# EAGLE board MP3-Shield-Panel-v15 (EAGLE 6.6.0), part 1 of 2
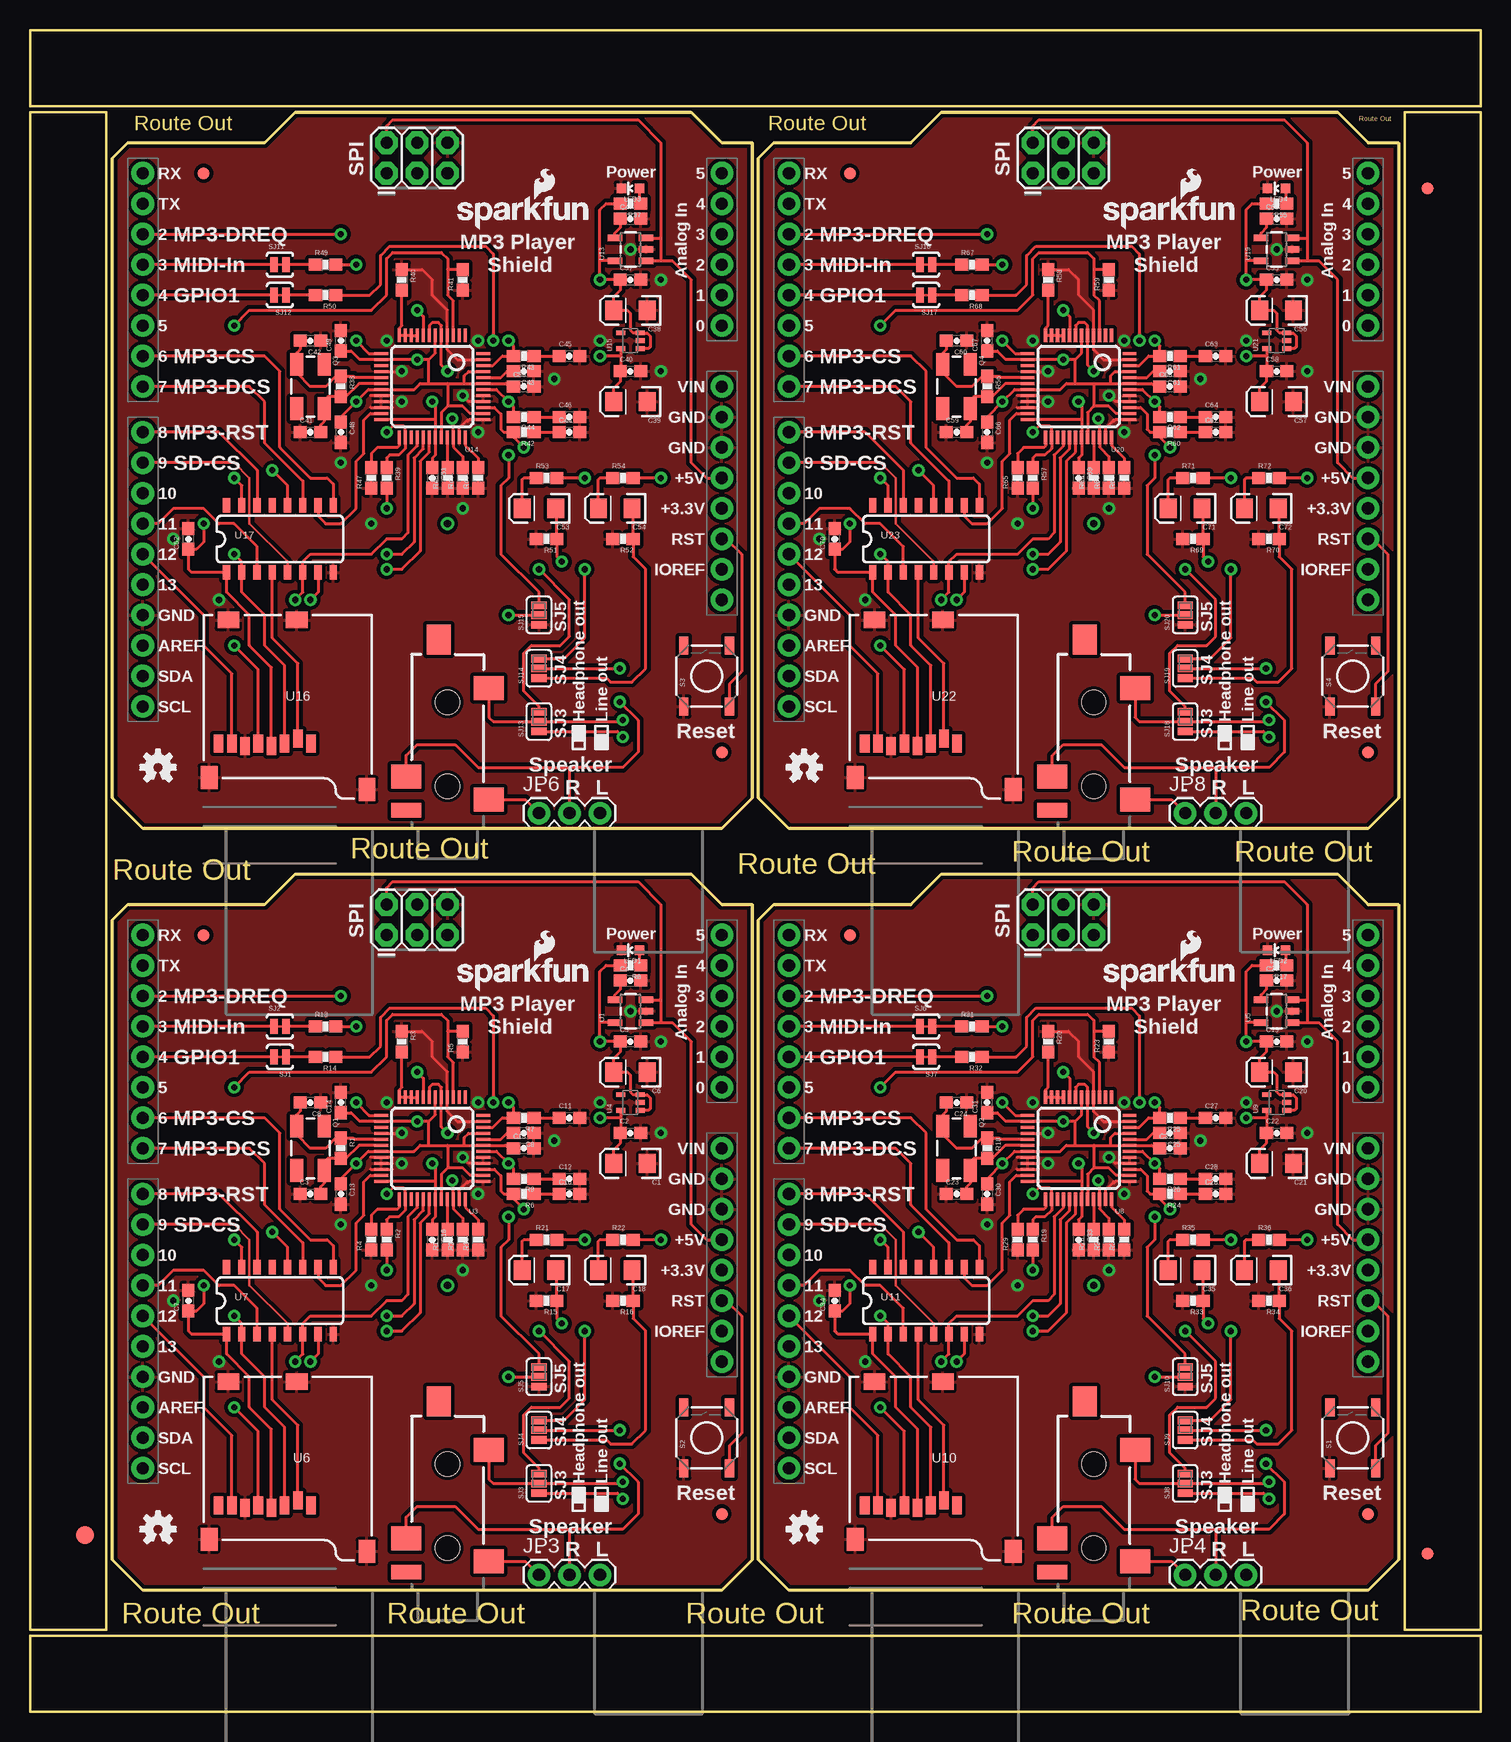
[diagram p0: board, top side]
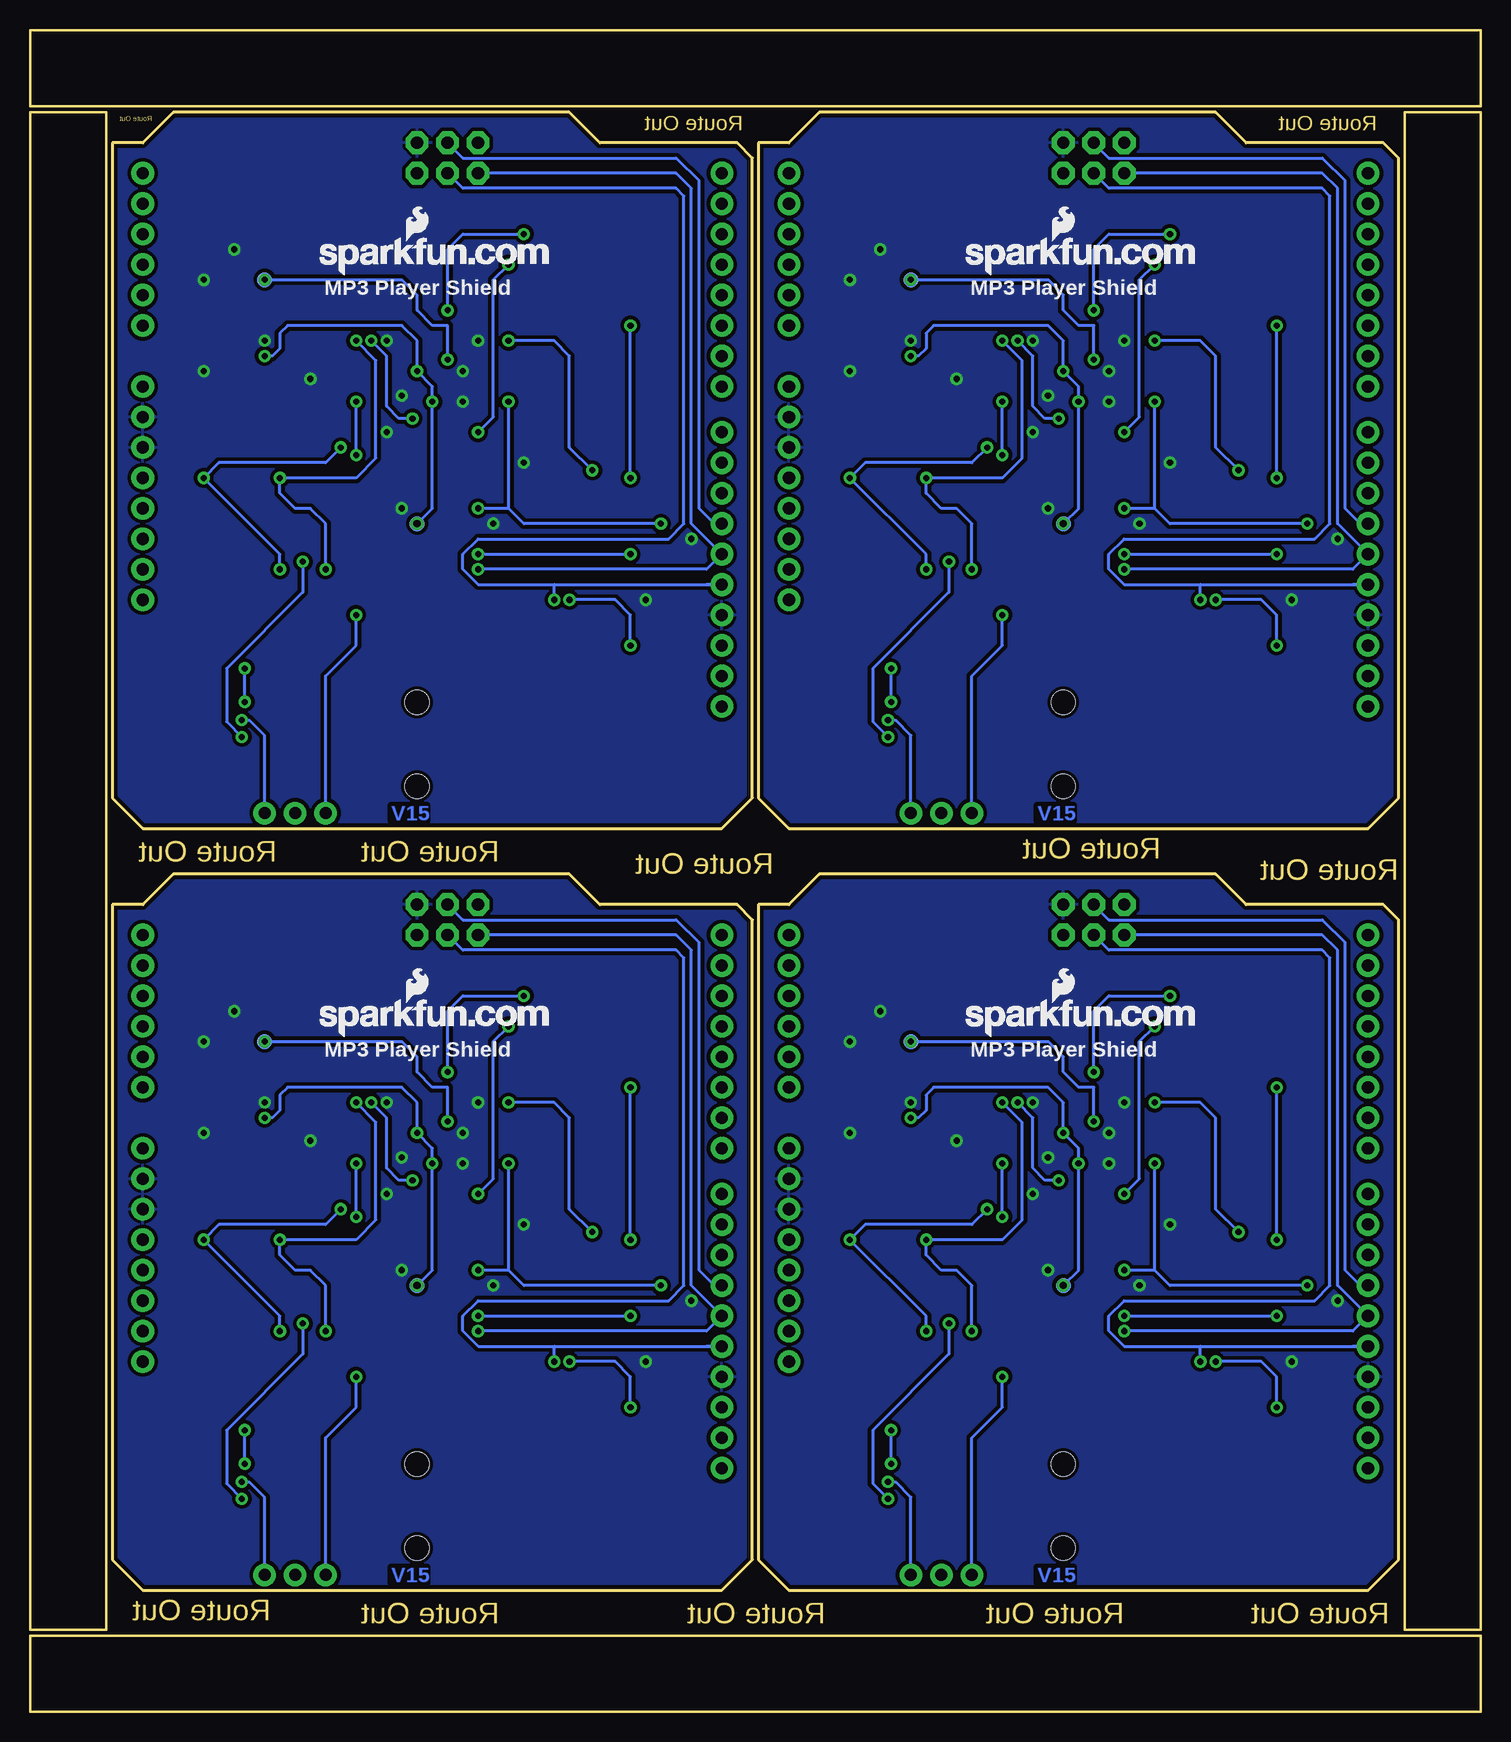
[diagram p1: board, bottom side, seen from below]

Size 120.9 x 140.21 mm. Coordinates in mm from the lower left corner, seen from the top.
Outline: 9.4,10.16 6.86,12.7 6.86,66.04 8.13,67.31 19.56,67.31 22.1,69.85 55.12,69.85 57.66,67.31 60.2,67.31 60.2,12.7 57.66,10.16 9.4,10.16
Outline: 63.25,10.16 60.71,12.7 60.71,66.04 61.98,67.31 73.41,67.31 75.95,69.85 108.97,69.85 111.51,67.31 114.05,67.31 114.05,12.7 111.51,10.16 63.25,10.16
Outline: 9.4,73.66 6.86,76.2 6.86,129.54 8.13,130.81 19.56,130.81 22.1,133.35 55.12,133.35 57.66,130.81 60.2,130.81 60.2,76.2 57.66,73.66 9.4,73.66
Outline: 63.25,73.66 60.71,76.2 60.71,129.54 61.98,130.81 73.41,130.81 75.95,133.35 108.97,133.35 111.51,130.81 114.05,130.81 114.05,76.2 111.51,73.66 63.25,73.66
Outline: 6.35,6.86 6.35,133.35 0,133.35 0,6.86 6.35,6.86
Outline: 0,0 120.9,0 120.9,6.35 0,6.35 0,0
Outline: 120.9,6.86 120.9,133.35 114.55,133.35 114.55,6.86 120.9,6.86
Outline: 120.9,140.21 0,140.21 0,133.86 120.9,133.86 120.9,140.21
Copper layers (1*16): Top 0.035mm / dielectric 1.5mm / Bottom 0.035mm
Design rules "SparkFun-2-layer": minimum track width 7mil, minimum drill 15mil, track to track 8mil, track to pad 8mil, pad to pad 8mil, via to via 8mil, smd to smd 8mil, copper to edge 8mil, drill to drill 8mil, minimum pad ring 12mil, minimum via ring 10mil, stop-mask expansion 4mil, vias tented up to drill 20mil, thermal gap 10mil

## Footprints (pad centres in the part's own frame; a part is rotated, then mirrored left to right if it is on the bottom)
EIA3216 = smd 1.4 x 1.6: A 1.4,0; C -1.4,0
0603-CAP = smd 1.1 x 1: 1 -0.85,0; 2 0.85,0
FIDUCIAL-1.5X3 = smd 1.5 x 1.5: 1 0,0
FIDUCIAL-1X2 = smd 1 x 1: 1 0,0
2X3 = drill 1.016 pad 1.88 octagon: 1 0,0; 2 0,2.54; 3 2.54,0; 4 2.54,2.54; 5 5.08,0; 6 5.08,2.54
AUDIO-JACK-3.5MM-SMD = smd 2 x 2.5: RING 4.3,3.45; SLEEVE 2.4,-3.45; TIP 11.7,-3.45 | smd 1.2 x 2.5: RSH 1.5,3.45 | smd 2.5 x 2: TSH 15.75,0.75 | hole 2: 3.5,0; 10.5,0
1X03 = drill 1.016 pad 1.88: 1 0,0; 2 2.54,0; 3 5.08,0
LED-0603 = smd 0.8 x 0.8: A 0,-0.75; C 0,0.75
CRYSTAL-SMD-5X3 = smd 1.9 x 1.1: 1 -1.85,-1.15; 2 1.85,-1.15; 3 1.85,1.15; 4 -1.85,1.15
0603-RES = smd 1.1 x 1: 1 -0.85,0; 2 0.85,0
TACTILE_SWITCH_SMD = smd 1.524 x 0.762: 1 -2.54,1.905; 2 2.54,1.905; 3 -2.54,-1.905; 4 2.54,-1.905
SJ_2S-TRACE = smd 0.635 x 1.27: 1 -0.508,0; 2 0.508,0
PAD-JUMPER-3-2OF3_NC_BY_PASTE_YES_SILK_FULL_BOX = smd 0.635 x 1.27: 1 -0.813,0; 2 0,0; 3 0.813,0
PAD.03X.05 = smd 1.27 x 1.27: P$1 0,0
SOT23-5 = smd 0.55 x 1.2: 1 -0.95,-1.3; 2 0,-1.3; 3 0.95,-1.3; 4 0.95,1.3; 5 -0.95,1.3
UNO_R3_SHIELD = drill 1.016 pad 1.88: 3.3V 50.8,26.67; 5V 50.8,29.21; A0 50.8,41.91; A1 50.8,44.45; A2 50.8,46.99; A3 50.8,49.53; A4 50.8,52.07; A5 50.8,54.61; AREF 2.54,15.24; D2 2.54,49.53; D3 2.54,46.99; D4 2.54,44.45; D5 2.54,41.91; D6 2.54,39.37; D7 2.54,36.83; D8 2.54,33.02; D9 2.54,30.48; D10 2.54,27.94; D11 2.54,25.4; D12 2.54,22.86; D13 2.54,20.32; GND@0 50.8,31.75; GND@1 50.8,34.29; GND@2 2.54,17.78; IOREF 50.8,21.59; NC 50.8,19.05; RES 50.8,24.13; RX 2.54,54.61; SCL 2.54,10.16; SDA 2.54,12.7; TX 2.54,52.07; VIN 50.8,36.83
LQFP-48 = smd 0.254 x 1.143: 1 -2.75,-4.25; 2 -2.25,-4.25; 3 -1.75,-4.25; 4 -1.25,-4.25; 5 -0.75,-4.25; 6 -0.25,-4.25; 7 0.25,-4.25; 8 0.75,-4.25; 9 1.25,-4.25; 10 1.75,-4.25; 11 2.25,-4.25; 12 2.75,-4.25; 25 2.75,4.25; 26 2.25,4.25; 27 1.75,4.25; 28 1.25,4.25; 29 0.75,4.25; 30 0.25,4.25; 31 -0.25,4.25; 32 -0.75,4.25; 33 -1.25,4.25; 34 -1.75,4.25; 35 -2.25,4.25; 36 -2.75,4.25 | smd 1.143 x 0.254: 13 4.25,-2.75; 14 4.25,-2.25; 15 4.25,-1.75; 16 4.25,-1.25; 17 4.25,-0.75; 18 4.25,-0.25; 19 4.25,0.25; 20 4.25,0.75; 21 4.25,1.25; 22 4.25,1.75; 23 4.25,2.25; 24 4.25,2.75; 37 -4.25,2.75; 38 -4.25,2.25; 39 -4.25,1.75; 40 -4.25,1.25; 41 -4.25,0.75; 42 -4.25,0.25; 43 -4.25,-0.25; 44 -4.25,-0.75; 45 -4.25,-1.25; 46 -4.25,-1.75; 47 -4.25,-2.25; 48 -4.25,-2.75
SC70 = smd 0.4 x 0.75: 1 -0.65,-0.825; 2 0,-0.825; 3 0.65,-0.825; 4 0.65,0.825; 5 -0.65,0.825
MICRO-SD-SOCKET-PP = smd 0.8 x 1.5: 1 -8.94,10.7; 2 -7.84,10.3; 3 -6.74,10.7; 4 -5.64,10.9; 5 -4.54,10.7; 6 -3.44,10.9; 7 -2.34,10.7; 8 -1.24,10.7 | smd 1.8 x 1.4: CD1 -2.05,0.4; CD2 -7.75,0.4 | smd 1.4 x 1.9: GND1 -13.6,14.55; GND3 -0.45,13.55
SO016 = smd 0.6 x 1.2: 1 -4.445,-2.8; 2 -3.175,-2.8; 3 -1.905,-2.8; 4 -0.635,-2.8; 5 0.635,-2.8; 6 1.905,-2.8; 7 3.175,-2.8; 8 4.445,-2.8; 9 4.445,2.8; 10 3.175,2.8; 11 1.905,2.8; 12 0.635,2.8; 13 -0.635,2.8; 14 -1.905,2.8; 15 -3.175,2.8; 16 -4.445,2.8

## Placement (x,y rotation side)
C1  10uF  [EIA3216]  50.04,45.72 180 top
C2  0.1uF  [0603-CAP]  50.04,48.26 0 top
C3  22pF  [0603-CAP]  23.37,43.18 0 top
C4  470pF  [0603-CAP]  50.04,60.96 0 top
C5  0.1uF  [0603-CAP]  50.04,55.88 0 top
C6  10uF  [EIA3216]  50.04,53.34 180 top
C7  0.1uF  [0603-CAP]  13.21,34.29 90 top
C8  22pF  [0603-CAP]  23.37,50.8 180 top
C9  1.0uF  [0603-CAP]  41.15,48.26 180 top
C10  10nF  [0603-CAP]  44.96,43.18 0 top
C11  10nF  [0603-CAP]  44.96,49.53 0 top
C12  47nF  [0603-CAP]  44.96,44.45 0 top
C13  0.1uF  [0603-CAP]  25.91,43.18 270 top
C14  0.1uF  [0603-CAP]  25.91,50.8 90 top
C15  0.1uF  [0603-CAP]  41.15,46.99 0 top
C16  0.1uF  [0603-CAP]  33.53,39.37 270 top
C17  10uF  [EIA3216]  42.42,36.83 180 top
C18  10uF  [EIA3216]  48.77,36.83 180 top
C19  0.1uF  [0603-CAP]  103.89,55.88 0 top
C20  10uF  [EIA3216]  103.89,53.34 180 top
C21  10uF  [EIA3216]  103.89,45.72 180 top
C22  0.1uF  [0603-CAP]  103.89,48.26 0 top
C23  22pF  [0603-CAP]  77.22,43.18 0 top
C24  22pF  [0603-CAP]  77.22,50.8 180 top
C25  1.0uF  [0603-CAP]  95,48.26 180 top
C26  10nF  [0603-CAP]  98.81,43.18 0 top
C27  10nF  [0603-CAP]  98.81,49.53 0 top
C28  47nF  [0603-CAP]  98.81,44.45 0 top
C29  470pF  [0603-CAP]  103.89,60.96 0 top
C30  0.1uF  [0603-CAP]  79.76,43.18 270 top
C31  0.1uF  [0603-CAP]  79.76,50.8 90 top
C32  0.1uF  [0603-CAP]  95,46.99 0 top
C33  0.1uF  [0603-CAP]  87.38,39.37 270 top
C34  0.1uF  [0603-CAP]  67.06,34.29 90 top
C35  10uF  [EIA3216]  96.27,36.83 180 top
C36  10uF  [EIA3216]  102.62,36.83 180 top
C37  0.1uF  [0603-CAP]  50.04,119.38 0 top
C38  10uF  [EIA3216]  50.04,116.84 180 top
C39  10uF  [EIA3216]  50.04,109.22 180 top
C40  0.1uF  [0603-CAP]  50.04,111.76 0 top
C41  22pF  [0603-CAP]  23.37,106.68 0 top
C42  22pF  [0603-CAP]  23.37,114.3 180 top
C43  1.0uF  [0603-CAP]  41.15,111.76 180 top
C44  10nF  [0603-CAP]  44.96,106.68 0 top
C45  10nF  [0603-CAP]  44.96,113.03 0 top
C46  47nF  [0603-CAP]  44.96,107.95 0 top
C47  470pF  [0603-CAP]  50.04,124.46 0 top
C48  0.1uF  [0603-CAP]  25.91,106.68 270 top
C49  0.1uF  [0603-CAP]  25.91,114.3 90 top
C50  0.1uF  [0603-CAP]  41.15,110.49 0 top
C51  0.1uF  [0603-CAP]  33.53,102.87 270 top
C52  0.1uF  [0603-CAP]  13.21,97.79 90 top
C53  10uF  [EIA3216]  42.42,100.33 180 top
C54  10uF  [EIA3216]  48.77,100.33 180 top
C55  0.1uF  [0603-CAP]  103.89,119.38 0 top
C56  10uF  [EIA3216]  103.89,116.84 180 top
C57  10uF  [EIA3216]  103.89,109.22 180 top
C58  0.1uF  [0603-CAP]  103.89,111.76 0 top
C59  22pF  [0603-CAP]  77.22,106.68 0 top
C60  22pF  [0603-CAP]  77.22,114.3 180 top
C61  1.0uF  [0603-CAP]  95,111.76 180 top
C62  10nF  [0603-CAP]  98.81,106.68 0 top
C63  10nF  [0603-CAP]  98.81,113.03 0 top
C64  47nF  [0603-CAP]  98.81,107.95 0 top
C65  470pF  [0603-CAP]  103.89,124.46 0 top
C66  0.1uF  [0603-CAP]  79.76,106.68 270 top
C67  0.1uF  [0603-CAP]  79.76,114.3 90 top
C68  0.1uF  [0603-CAP]  95,110.49 0 top
C69  0.1uF  [0603-CAP]  87.38,102.87 270 top
C70  0.1uF  [0603-CAP]  67.06,97.79 90 top
C71  10uF  [EIA3216]  96.27,100.33 180 top
C72  10uF  [EIA3216]  102.62,100.33 180 top
E$1  [FIDUCIAL-1.5X3]  4.57,14.73 0 top
E$4  [FIDUCIAL-1X2]  116.46,13.21 0 top
E$5  [FIDUCIAL-1X2]  116.46,127 180 top
J1  ISP/SPI  [2X3]  29.72,64.77 0 top
J2  ISP/SPI  [2X3]  83.57,64.77 0 top
J3  ISP/SPI  [2X3]  29.72,128.27 0 top
J4  ISP/SPI  [2X3]  83.57,128.27 0 top
JP1  [AUDIO-JACK-3.5MM-SMD]  34.8,10.16 90 top
JP2  [AUDIO-JACK-3.5MM-SMD]  88.65,10.16 90 top
JP3  Optional  [1X03]  42.42,11.43 0 top
JP4  Optional  [1X03]  96.27,11.43 0 top
JP5  [AUDIO-JACK-3.5MM-SMD]  34.8,73.66 90 top
JP6  Optional  [1X03]  42.42,74.93 0 top
JP7  [AUDIO-JACK-3.5MM-SMD]  88.65,73.66 90 top
JP8  Optional  [1X03]  96.27,74.93 0 top
LED1  Power  [LED-0603]  50.04,63.5 90 top
LED2  Power  [LED-0603]  103.89,63.5 90 top
LED3  Power  [LED-0603]  50.04,127 90 top
LED4  Power  [LED-0603]  103.89,127 90 top
LOGO1  OSHW-LOGOS  [OSHW-LOGO-S]  10.67,15.24 0 top
LOGO2  SFE_LOGO_NAME_FLAME.1_INCH  [SFE_LOGO_NAME_FLAME_.1]  35.18,59.94 0 top
LOGO3  OSHW-LOGOS  [OSHW-LOGO-S]  64.52,15.24 0 top
LOGO4  SFE_LOGO_NAME_FLAME.1_INCH  [SFE_LOGO_NAME_FLAME_.1]  89.03,59.94 0 top
LOGO5  OSHW-LOGOS  [OSHW-LOGO-S]  10.67,78.74 0 top
LOGO6  SFE_LOGO_NAME_FLAME.1_INCH  [SFE_LOGO_NAME_FLAME_.1]  35.18,123.44 0 top
LOGO7  OSHW-LOGOS  [OSHW-LOGO-S]  64.52,78.74 0 top
LOGO8  SFE_LOGO_NAME_FLAME.1_INCH  [SFE_LOGO_NAME_FLAME_.1]  89.03,123.44 0 top
Q1  12.288MHz  [CRYSTAL-SMD-5X3]  23.37,46.99 270 top
Q2  12.288MHz  [CRYSTAL-SMD-5X3]  77.22,46.99 270 top
Q3  12.288MHz  [CRYSTAL-SMD-5X3]  23.37,110.49 270 top
Q4  12.288MHz  [CRYSTAL-SMD-5X3]  77.22,110.49 270 top
R1  1M  [0603-RES]  25.91,46.99 270 top
R2  100k  [0603-RES]  29.72,39.37 270 top
R3  100k  [0603-RES]  30.99,55.88 270 top
R4  100k  [0603-RES]  28.45,39.37 90 top
R5  100k  [0603-RES]  36.07,55.88 90 top
R6  20  [0603-RES]  41.15,43.18 180 top
R7  20  [0603-RES]  41.15,49.53 180 top
R8  330  [0603-RES]  50.04,62.23 180 top
R9  10  [0603-RES]  41.15,44.45 180 top
R10  100k  [0603-RES]  36.07,39.37 90 top
R11  100k  [0603-RES]  34.8,39.37 90 top
R12  100k  [0603-RES]  37.34,39.37 90 top
R13  1K  [0603-RES]  24.64,57.15 0 top
R14  1K  [0603-RES]  24.64,54.61 180 top
R15  10K  [0603-RES]  43.05,34.29 180 top
R16  10K  [0603-RES]  49.4,34.29 180 top
R17  330  [0603-RES]  103.89,62.23 180 top
R18  1M  [0603-RES]  79.76,46.99 270 top
R19  100k  [0603-RES]  83.57,39.37 270 top
R20  100k  [0603-RES]  84.84,55.88 270 top
R21  470  [0603-RES]  43.05,39.37 0 top
R22  470  [0603-RES]  49.4,39.37 0 top
R23  100k  [0603-RES]  89.92,55.88 90 top
R24  20  [0603-RES]  95,43.18 180 top
R25  20  [0603-RES]  95,49.53 180 top
R26  10  [0603-RES]  95,44.45 180 top
R27  100k  [0603-RES]  89.92,39.37 90 top
R28  100k  [0603-RES]  88.65,39.37 90 top
R29  100k  [0603-RES]  82.3,39.37 90 top
R30  100k  [0603-RES]  91.19,39.37 90 top
R31  1K  [0603-RES]  78.49,57.15 0 top
R32  1K  [0603-RES]  78.49,54.61 180 top
R33  10K  [0603-RES]  96.9,34.29 180 top
R34  10K  [0603-RES]  103.25,34.29 180 top
R35  470  [0603-RES]  96.9,39.37 0 top
R36  470  [0603-RES]  103.25,39.37 0 top
R37  330  [0603-RES]  50.04,125.73 180 top
R38  1M  [0603-RES]  25.91,110.49 270 top
R39  100k  [0603-RES]  29.72,102.87 270 top
R40  100k  [0603-RES]  30.99,119.38 270 top
R41  100k  [0603-RES]  36.07,119.38 90 top
R42  20  [0603-RES]  41.15,106.68 180 top
R43  20  [0603-RES]  41.15,113.03 180 top
R44  10  [0603-RES]  41.15,107.95 180 top
R45  100k  [0603-RES]  36.07,102.87 90 top
R46  100k  [0603-RES]  34.8,102.87 90 top
R47  100k  [0603-RES]  28.45,102.87 90 top
R48  100k  [0603-RES]  37.34,102.87 90 top
R49  1K  [0603-RES]  24.64,120.65 0 top
R50  1K  [0603-RES]  24.64,118.11 180 top
R51  10K  [0603-RES]  43.05,97.79 180 top
R52  10K  [0603-RES]  49.4,97.79 180 top
R53  470  [0603-RES]  43.05,102.87 0 top
R54  470  [0603-RES]  49.4,102.87 0 top
R55  330  [0603-RES]  103.89,125.73 180 top
R56  1M  [0603-RES]  79.76,110.49 270 top
R57  100k  [0603-RES]  83.57,102.87 270 top
R58  100k  [0603-RES]  84.84,119.38 270 top
R59  100k  [0603-RES]  89.92,119.38 90 top
R60  20  [0603-RES]  95,106.68 180 top
R61  20  [0603-RES]  95,113.03 180 top
R62  10  [0603-RES]  95,107.95 180 top
R63  100k  [0603-RES]  89.92,102.87 90 top
R64  100k  [0603-RES]  88.65,102.87 90 top
R65  100k  [0603-RES]  82.3,102.87 90 top
R66  100k  [0603-RES]  91.19,102.87 90 top
R67  1K  [0603-RES]  78.49,120.65 0 top
R68  1K  [0603-RES]  78.49,118.11 180 top
R69  10K  [0603-RES]  96.9,97.79 180 top
R70  10K  [0603-RES]  103.25,97.79 180 top
R71  470  [0603-RES]  96.9,102.87 0 top
R72  470  [0603-RES]  103.25,102.87 0 top
S1  Reset  [TACTILE_SWITCH_SMD]  110.24,22.86 90 top
S2  Reset  [TACTILE_SWITCH_SMD]  56.39,22.86 90 top
S3  Reset  [TACTILE_SWITCH_SMD]  56.39,86.36 90 top
S4  Reset  [TACTILE_SWITCH_SMD]  110.24,86.36 90 top
SJ1  NC  [SJ_2S-TRACE]  20.83,54.61 180 top
SJ2  NC  [SJ_2S-TRACE]  20.83,57.15 0 top
SJ3  AC Coupling L  [PAD-JUMPER-3-2OF3_NC_BY_PASTE_YES_SILK_FULL_BOX]  42.42,19.05 90 top
SJ4  AC Coupling R  [PAD-JUMPER-3-2OF3_NC_BY_PASTE_YES_SILK_FULL_BOX]  42.42,23.5 90 top
SJ5  AC Coupling Gnd  [PAD-JUMPER-3-2OF3_NC_BY_PASTE_YES_SILK_FULL_BOX]  42.42,27.94 90 top
SJ6  NC  [SJ_2S-TRACE]  74.68,57.15 0 top
SJ7  NC  [SJ_2S-TRACE]  74.68,54.61 180 top
SJ8  AC Coupling L  [PAD-JUMPER-3-2OF3_NC_BY_PASTE_YES_SILK_FULL_BOX]  96.27,19.05 90 top
SJ9  AC Coupling R  [PAD-JUMPER-3-2OF3_NC_BY_PASTE_YES_SILK_FULL_BOX]  96.27,23.5 90 top
SJ10  AC Coupling Gnd  [PAD-JUMPER-3-2OF3_NC_BY_PASTE_YES_SILK_FULL_BOX]  96.27,27.94 90 top
SJ11  NC  [SJ_2S-TRACE]  20.83,120.65 0 top
SJ12  NC  [SJ_2S-TRACE]  20.83,118.11 180 top
SJ13  AC Coupling L  [PAD-JUMPER-3-2OF3_NC_BY_PASTE_YES_SILK_FULL_BOX]  42.42,82.55 90 top
SJ14  AC Coupling R  [PAD-JUMPER-3-2OF3_NC_BY_PASTE_YES_SILK_FULL_BOX]  42.42,87 90 top
SJ15  AC Coupling Gnd  [PAD-JUMPER-3-2OF3_NC_BY_PASTE_YES_SILK_FULL_BOX]  42.42,91.44 90 top
SJ16  NC  [SJ_2S-TRACE]  74.68,120.65 0 top
SJ17  NC  [SJ_2S-TRACE]  74.68,118.11 180 top
SJ18  AC Coupling L  [PAD-JUMPER-3-2OF3_NC_BY_PASTE_YES_SILK_FULL_BOX]  96.27,82.55 90 top
SJ19  AC Coupling R  [PAD-JUMPER-3-2OF3_NC_BY_PASTE_YES_SILK_FULL_BOX]  96.27,87 90 top
SJ20  AC Coupling Gnd  [PAD-JUMPER-3-2OF3_NC_BY_PASTE_YES_SILK_FULL_BOX]  96.27,91.44 90 top
TP1  [PAD.03X.05]  47.5,55.88 0 bottom
TP2  [PAD.03X.05]  34.8,35.56 0 bottom
TP3  [PAD.03X.05]  101.35,55.88 0 bottom
TP4  [PAD.03X.05]  88.65,35.56 0 bottom
TP5  [PAD.03X.05]  47.5,119.38 0 bottom
TP6  [PAD.03X.05]  34.8,99.06 0 bottom
TP7  [PAD.03X.05]  101.35,119.38 0 bottom
TP8  [PAD.03X.05]  88.65,99.06 0 bottom
U1  3.3V  [SOT23-5]  50.04,58.42 90 top
U2  ARDUINO_R3_SHIELD  [UNO_R3_SHIELD]  6.86,10.16 0 top
U3  VS1053  [LQFP-48]  33.53,46.99 180 top
U4  1.8V  [SC70]  50.04,50.8 90 top
U5  3.3V  [SOT23-5]  103.89,58.42 90 top
U6  USD-SOCKET  [MICRO-SD-SOCKET-PP]  14.48,27.94 180 top
U7  74HC4050 LVL CONVERTER  [SO016]  20.83,34.29 0 top
U8  VS1053  [LQFP-48]  87.38,46.99 180 top
U9  1.8V  [SC70]  103.89,50.8 90 top
U10  USD-SOCKET  [MICRO-SD-SOCKET-PP]  68.33,27.94 180 top
U11  74HC4050 LVL CONVERTER  [SO016]  74.68,34.29 0 top
U12  ARDUINO_R3_SHIELD  [UNO_R3_SHIELD]  60.71,10.16 0 top
U13  3.3V  [SOT23-5]  50.04,121.92 90 top
U14  VS1053  [LQFP-48]  33.53,110.49 180 top
U15  1.8V  [SC70]  50.04,114.3 90 top
U16  USD-SOCKET  [MICRO-SD-SOCKET-PP]  14.48,91.44 180 top
U17  74HC4050 LVL CONVERTER  [SO016]  20.83,97.79 0 top
U18  ARDUINO_R3_SHIELD  [UNO_R3_SHIELD]  6.86,73.66 0 top
U19  3.3V  [SOT23-5]  103.89,121.92 90 top
U20  VS1053  [LQFP-48]  87.38,110.49 180 top
U21  1.8V  [SC70]  103.89,114.3 90 top
U22  USD-SOCKET  [MICRO-SD-SOCKET-PP]  68.33,91.44 180 top
U23  74HC4050 LVL CONVERTER  [SO016]  74.68,97.79 0 top
U24  ARDUINO_R3_SHIELD  [UNO_R3_SHIELD]  60.71,73.66 0 top
U$1  FIDUCIAL1X2  [FIDUCIAL-1X2]  68.33,64.77 0 top
U$2  FIDUCIAL1X2  [FIDUCIAL-1X2]  111.51,16.51 0 top
U$3  LOGO-SFENEW  [SFE-NEW-WEBLOGO]  96.77,56.26 0 bottom
U$4  FIDUCIAL1X2  [FIDUCIAL-1X2]  14.48,64.77 0 top
U$5  FIDUCIAL1X2  [FIDUCIAL-1X2]  57.66,16.51 0 top
U$6  FIDUCIAL1X2  [FIDUCIAL-1X2]  14.48,128.27 0 top
U$7  FIDUCIAL1X2  [FIDUCIAL-1X2]  57.66,80.01 0 top
U$8  LOGO-SFENEW  [SFE-NEW-WEBLOGO]  42.93,56.26 0 bottom
U$9  LOGO-SFENEW  [SFE-NEW-WEBLOGO]  42.93,119.76 0 bottom
U$10  FIDUCIAL1X2  [FIDUCIAL-1X2]  68.33,128.27 0 top
U$11  FIDUCIAL1X2  [FIDUCIAL-1X2]  111.51,80.01 0 top
U$12  LOGO-SFENEW  [SFE-NEW-WEBLOGO]  96.77,119.76 0 bottom

## Library data of the parts
C1 C6 C17 C18 C20 C21 C35 C36 C38 C39 C53 C54 C56 C57 C71 C72 = SparkFun-Capacitors; PROD_ID: CAP-00811
C2 C5 C7 C13-C16 C19 C22 C30-C34 C37 C40 C48-C52 C55 C58 C66-C70 = SparkFun-Capacitors; PROD_ID: CAP-00810
C3 C8 C23 C24 C41 C42 C59 C60 = SparkFun-Capacitors; PROD_ID: CAP-07876
C4 C29 C47 C65 = SparkFun-Capacitors; PROD_ID: CAP-07884
C9 C25 C43 C61 = SparkFun-Capacitors; PROD_ID: CAP-00868
C10 C11 C26 C27 C44 C45 C62 C63 = SparkFun-Capacitors; PROD_ID: CAP-00867
C12 C28 C46 C64 = SparkFun-Capacitors; PROD_ID: CAP-08605
E$1 = SparkFun-Retired
E$4 E$5 LOGO1-LOGO8 = SparkFun-Aesthetics
J1-J4 JP3 JP4 JP6 JP8 SJ1 SJ2 SJ6 SJ7 SJ11 SJ12 SJ16 SJ17 TP1-TP8 U$1-U$12 = SparkFun
JP1 JP2 JP5 JP7 = SparkFun-Connectors; PROD_ID: CONN-10353
LED1-LED4 = SparkFun-LED; PROD_ID: DIO-00819
Q1-Q4 = SparkFun; PROD_ID: XTAL-09653
R1 R18 R38 R56 = SparkFun-Resistors; PROD_ID: RES-07868
R2-R5 R10-R12 R19 R20 R23 R27-R30 R39-R41 R45-R48 R57-R59 R63-R66 = SparkFun-Resistors; PROD_ID: RES-07828
R6 R7 R24 R25 R42 R43 R60 R61 = SparkFun-Resistors; PROD_ID: RES-07862
R8 R17 R37 R55 = SparkFun-Resistors; PROD_ID: RES-00818
R9 R26 R44 R62 = SparkFun-Resistors; PROD_ID: RES-09834
R13 R14 R31 R32 R49 R50 R67 R68 = SparkFun-Resistors; PROD_ID: RES-07856
R15 R16 R33 R34 R51 R52 R69 R70 = SparkFun-Resistors; PROD_ID: RES-00824
R21 R22 R35 R36 R53 R54 R71 R72 = SparkFun-Resistors; PROD_ID: RES-07869
S1-S4 = SparkFun-Electromechanical; PROD_ID: SWCH-08247
SJ3-SJ5 SJ8-SJ10 SJ13-SJ15 SJ18-SJ20 = SparkFun-Passives
U1 U5 U13 U19 = SparkFun-PowerIC; PROD_ID: VREG-00822
U2 U12 U18 U24 = SparkFun-Boards
U3 U8 U14 U20 = SparkFun-DigitalIC; PROD_ID: IC-08983
U4 U9 U15 U21 = SparkFun-PowerIC; PROD_ID: VREG-08428
U6 U10 U16 U22 = SparkFun; PROD_ID: CONN-07820
U7 U11 U17 U23 = SparkFun-DigitalIC; PROD_ID: IC-09604

## Nets
1.8V: C1.A C2.1 C16.1 TP2.P$1 U3.5 U3.7 U3.24 U3.31 U4.5
1.8V1: C21.A C22.1 C33.1 TP4.P$1 U8.5 U8.7 U8.24 U8.31 U9.5
1.8V2: C39.A C40.1 C51.1 TP6.P$1 U14.5 U14.7 U14.24 U14.31 U15.5
1.8V3: C57.A C58.1 C69.1 TP8.P$1 U20.5 U20.7 U20.24 U20.31 U21.5
3.3V: C5.1 C6.A C7.1 C13.1 C14.1 C15.1 R2.2 R8.2 TP1.P$1 U1.5 U3.6 U3.14 U3.19 U3.32 U3.38 U3.43 U3.45 U4.1 U4.3 U6.4 U7.1
3.3V1: C19.1 C20.A C30.1 C31.1 C32.1 C34.1 R17.2 R19.2 TP3.P$1 U5.5 U8.6 U8.14 U8.19 U8.32 U8.38 U8.43 U8.45 U9.1 U9.3 U10.4 U11.1
3.3V2: C37.1 C38.A C48.1 C49.1 C50.1 C52.1 R37.2 R39.2 TP5.P$1 U13.5 U14.6 U14.14 U14.19 U14.32 U14.38 U14.43 U14.45 U15.1 U15.3 U16.4 U17.1
3.3V3: C55.1 C56.A C66.1 C67.1 C68.1 C70.1 R55.2 R57.2 TP7.P$1 U19.5 U20.6 U20.14 U20.19 U20.32 U20.38 U20.43 U20.45 U21.1 U21.3 U22.4 U23.1
5V-GPIO1: SJ1.2 U2.D4
5V-GPIO2: SJ7.2 U12.D4
5V-GPIO3: SJ12.2 U18.D4
5V-GPIO4: SJ17.2 U24.D4
5V-MIDI-RX: SJ2.1 U2.D3
5V-MIDI-RX1: SJ6.1 U12.D3
5V-MIDI-RX2: SJ11.1 U18.D3
5V-MIDI-RX3: SJ16.1 U24.D3
5V-MOSI: J1.4 U2.D11 U7.3
5V-MOSI1: J2.4 U11.3 U12.D11
5V-MOSI2: J3.4 U17.3 U18.D11
5V-MOSI3: J4.4 U23.3 U24.D11
5V-MP3-CS: U2.D6 U7.9
5V-MP3-CS1: U11.9 U12.D6
5V-MP3-CS2: U17.9 U18.D6
5V-MP3-CS3: U23.9 U24.D6
5V-MP3-DCS: U2.D7 U7.11
5V-MP3-DCS1: U11.11 U12.D7
5V-MP3-DCS2: U17.11 U18.D7
5V-MP3-DCS3: U23.11 U24.D7
5V-MP3-RST: U2.D8 U7.14
5V-MP3-RST1: U11.14 U12.D8
5V-MP3-RST2: U17.14 U18.D8
5V-MP3-RST3: U23.14 U24.D8
5V-SCK: J1.3 U2.D13 U7.7
5V-SCK1: J2.3 U11.7 U12.D13
5V-SCK2: J3.3 U17.7 U18.D13
5V-SCK3: J4.3 U23.7 U24.D13
5V-SD-CS: U2.D9 U7.5
5V-SD-CS1: U11.5 U12.D9
5V-SD-CS2: U17.5 U18.D9
5V-SD-CS3: U23.5 U24.D9
ARST: S2.3 U2.RES
ARST1: S1.3 U12.RES
ARST2: S3.3 U18.RES
ARST3: S4.3 U24.RES
G1: R3.2 U3.9 U3.10 U3.11 U3.12
G2: R4.2 U3.25
G3: R20.2 U8.9 U8.10 U8.11 U8.12
G4: R29.2 U8.25
G5: R40.2 U14.9 U14.10 U14.11 U14.12
G6: R47.2 U14.25
G7: R58.2 U20.9 U20.10 U20.11 U20.12
G8: R65.2 U20.25
GBUF: R9.2 SJ5.3 U3.42
GBUF1: R26.2 SJ10.3 U8.42
GBUF2: R44.2 SJ15.3 U14.42
GBUF3: R62.2 SJ20.3 U20.42
GND: C1.C C2.2 C3.1 C4.2 C5.2 C6.C C7.2 C8.1 C9.1 C10.2 C11.2 C12.2 C13.2 C14.2 C15.2 C16.2 J1.6 LED1.C R3.1 R4.1 R5.1 R10.1 R11.1 R12.1 R15.2 R16.2 S2.1 SJ5.1 U1.2 U2.GND@0 U2.GND@1 U2.GND@2 U3.4 U3.16 U3.20 U3.21 U3.22 U3.35 U3.37 U3.40 U3.41 U3.47 U4.2 U6.6 U6.CD1 U6.CD2 U6.GND1 U6.GND3 U7.8
GND1: C19.2 C20.C C21.C C22.2 C23.1 C24.1 C25.1 C26.2 C27.2 C28.2 C29.2 C30.2 C31.2 C32.2 C33.2 C34.2 J2.6 LED2.C R20.1 R23.1 R27.1 R28.1 R29.1 R30.1 R33.2 R34.2 S1.1 SJ10.1 U5.2 U8.4 U8.16 U8.20 U8.21 U8.22 U8.35 U8.37 U8.40 U8.41 U8.47 U9.2 U10.6 U10.CD1 U10.CD2 U10.GND1 U10.GND3 U11.8 U12.GND@0 U12.GND@1 U12.GND@2
GND2: C37.2 C38.C C39.C C40.2 C41.1 C42.1 C43.1 C44.2 C45.2 C46.2 C47.2 C48.2 C49.2 C50.2 C51.2 C52.2 J3.6 LED3.C R40.1 R41.1 R45.1 R46.1 R47.1 R48.1 R51.2 R52.2 S3.1 SJ15.1 U13.2 U14.4 U14.16 U14.20 U14.21 U14.22 U14.35 U14.37 U14.40 U14.41 U14.47 U15.2 U16.6 U16.CD1 U16.CD2 U16.GND1 U16.GND3 U17.8 U18.GND@0 U18.GND@1 U18.GND@2
GND3: C55.2 C56.C C57.C C58.2 C59.1 C60.1 C61.1 C62.2 C63.2 C64.2 C65.2 C66.2 C67.2 C68.2 C69.2 C70.2 J4.6 LED4.C R58.1 R59.1 R63.1 R64.1 R65.1 R66.1 R69.2 R70.2 S4.1 SJ20.1 U19.2 U20.4 U20.16 U20.20 U20.21 U20.22 U20.35 U20.37 U20.40 U20.41 U20.47 U21.2 U22.6 U22.CD1 U22.CD2 U22.GND1 U22.GND3 U23.8 U24.GND@0 U24.GND@1 U24.GND@2
GPIO0: R11.2 U3.33
GPIO1: R10.2 R14.1 U3.34
GPIO2: R28.2 U8.33
GPIO3: R27.2 R32.1 U8.34
GPIO4: R12.2 U3.36
GPIO5: R30.2 U8.36
GPIO6: R46.2 U14.33
GPIO7: R45.2 R50.1 U14.34
GPIO8: R48.2 U14.36
GPIO9: R64.2 U20.33
GPIO10: R63.2 R68.1 U20.34
GPIO11: R66.2 U20.36
LEFT: R7.2 R21.2 SJ3.3 U3.46
LEFT1: R25.2 R35.2 SJ8.3 U8.46
LEFT2: R43.2 R53.2 SJ13.3 U14.46
LEFT3: R61.2 R71.2 SJ18.3 U20.46
MIDI-RX: R2.1 R13.2 U3.26
MIDI-RX1: R19.1 R31.2 U8.26
MIDI-RX2: R39.1 R49.2 U14.26
MIDI-RX3: R57.1 R67.2 U20.26
MISO: J1.1 U2.D12 U3.30 U6.7
MISO1: J2.1 U8.30 U10.7 U12.D12
MISO2: J3.1 U14.30 U16.7 U18.D12
MISO3: J4.1 U20.30 U22.7 U24.D12
MOSI: U3.29 U6.3 U7.2
MOSI1: U8.29 U10.3 U11.2
MOSI2: U14.29 U16.3 U17.2
MOSI3: U20.29 U22.3 U23.2
MP3-CS: U3.23 U7.10
MP3-CS1: U8.23 U11.10
MP3-CS2: U14.23 U17.10
MP3-CS3: U20.23 U23.10
MP3-DCS: U3.13 U7.12
MP3-DCS1: U8.13 U11.12
MP3-DCS2: U14.13 U17.12
MP3-DCS3: U20.13 U23.12
MP3-DREQ: U2.D2 U3.8
MP3-DREQ1: U8.8 U12.D2
MP3-DREQ2: U14.8 U18.D2
MP3-DREQ3: U20.8 U24.D2
MP3-RST: R5.2 U3.3 U7.15
MP3-RST1: R23.2 U8.3 U11.15
MP3-RST2: R41.2 U14.3 U17.15
MP3-RST3: R59.2 U20.3 U23.15
N$1: LED2.A R17.1
N$2: C12.1 R9.1
N$3: C10.1 R6.1
N$4: R14.2 SJ1.1
N$5: C11.1 R7.1
N$6: LED1.A R8.1
N$7: C23.2 Q2.3 R18.2 U8.18
N$8: R13.1 SJ2.2
N$9: C3.2 Q1.3 R1.2 U3.18
N$10: C8.2 Q1.1 R1.1 U3.17
N$11: C24.2 Q2.1 R18.1 U8.17
N$12: JP1.SLEEVE JP3.1 SJ5.2
N$13: JP1.RING JP3.2 SJ4.2
N$14: JP1.TIP JP3.3 SJ3.2
N$15: C28.1 R26.1
N$16: C27.1 R25.1
N$17: C18.A R22.1
N$18: C26.1 R24.1
N$19: C17.A R21.1
N$20: C29.1 U5.4
N$21: R31.1 SJ6.2
N$22: R32.2 SJ7.1
N$23: C36.A R36.1
N$24: C35.A R35.1
N$25: JP2.SLEEVE JP4.1 SJ10.2
N$26: JP2.RING JP4.2 SJ9.2
N$27: JP2.TIP JP4.3 SJ8.2
N$28: LED3.A R37.1
N$29: C41.2 Q3.3 R38.2 U14.18
N$30: C42.2 Q3.1 R38.1 U14.17
N$31: C46.1 R44.1
N$32: C45.1 R43.1
N$33: C44.1 R42.1
N$34: C47.1 U13.4
N$35: R49.1 SJ11.2
N$36: R50.2 SJ12.1
N$37: C54.A R54.1
N$38: C53.A R53.1
N$39: JP5.SLEEVE JP6.1 SJ15.2
N$40: JP5.RING JP6.2 SJ14.2
N$41: JP5.TIP JP6.3 SJ13.2
N$42: LED4.A R55.1
N$43: C59.2 Q4.3 R56.2 U20.18
N$44: C60.2 Q4.1 R56.1 U20.17
N$45: C64.1 R62.1
N$46: C63.1 R61.1
N$47: C62.1 R60.1
N$48: C65.1 U19.4
N$49: R67.1 SJ16.2
N$50: R68.2 SJ17.1
N$51: C72.A R72.1
N$52: C71.A R71.1
N$53: JP7.SLEEVE JP8.1 SJ20.2
N$54: JP7.RING JP8.2 SJ19.2
N$55: JP7.TIP JP8.3 SJ18.2
N$70: C4.1 U1.4
RCAP: C9.2 U3.44
RCAP1: C25.2 U8.44
RCAP2: C43.2 U14.44
RCAP3: C61.2 U20.44
RIGHT: R6.2 R22.2 SJ4.3 U3.39
RIGHT1: R24.2 R36.2 SJ9.3 U8.39
RIGHT2: R42.2 R54.2 SJ14.3 U14.39
RIGHT3: R60.2 R72.2 SJ19.3 U20.39
SCK: U3.28 U6.5 U7.6
SCK1: U8.28 U10.5 U11.6
SCK2: U14.28 U16.5 U17.6
SCK3: U20.28 U22.5 U23.6
SD-CS: U6.2 U7.4
SD-CS1: U10.2 U11.4
SD-CS2: U16.2 U17.4
SD-CS3: U22.2 U23.4
SPKR-L: C17.C R15.1 SJ3.1
SPKR-L1: C35.C R33.1 SJ8.1
SPKR-L2: C53.C R51.1 SJ13.1
SPKR-L3: C71.C R69.1 SJ18.1
SPKR-R: C18.C R16.1 SJ4.1
SPKR-R1: C36.C R34.1 SJ9.1
SPKR-R2: C54.C R52.1 SJ14.1
SPKR-R3: C72.C R70.1 SJ19.1
VCC: J1.2 U1.1 U1.3 U2.5V
VCC1: J2.2 U5.1 U5.3 U12.5V
VCC2: J3.2 U13.1 U13.3 U18.5V
VCC3: J4.2 U19.1 U19.3 U24.5V